# Altium PCB RoomModule.PcbDoc
Units mil, origin at the board's own origin, x right, y up, seen from the top; angles counter-clockwise.
Board outline 4495 x 3260 mil, 2 copper layers (Top Layer, Bottom Layer); 57 components, 52 nets, 206 pads, 0 vias.
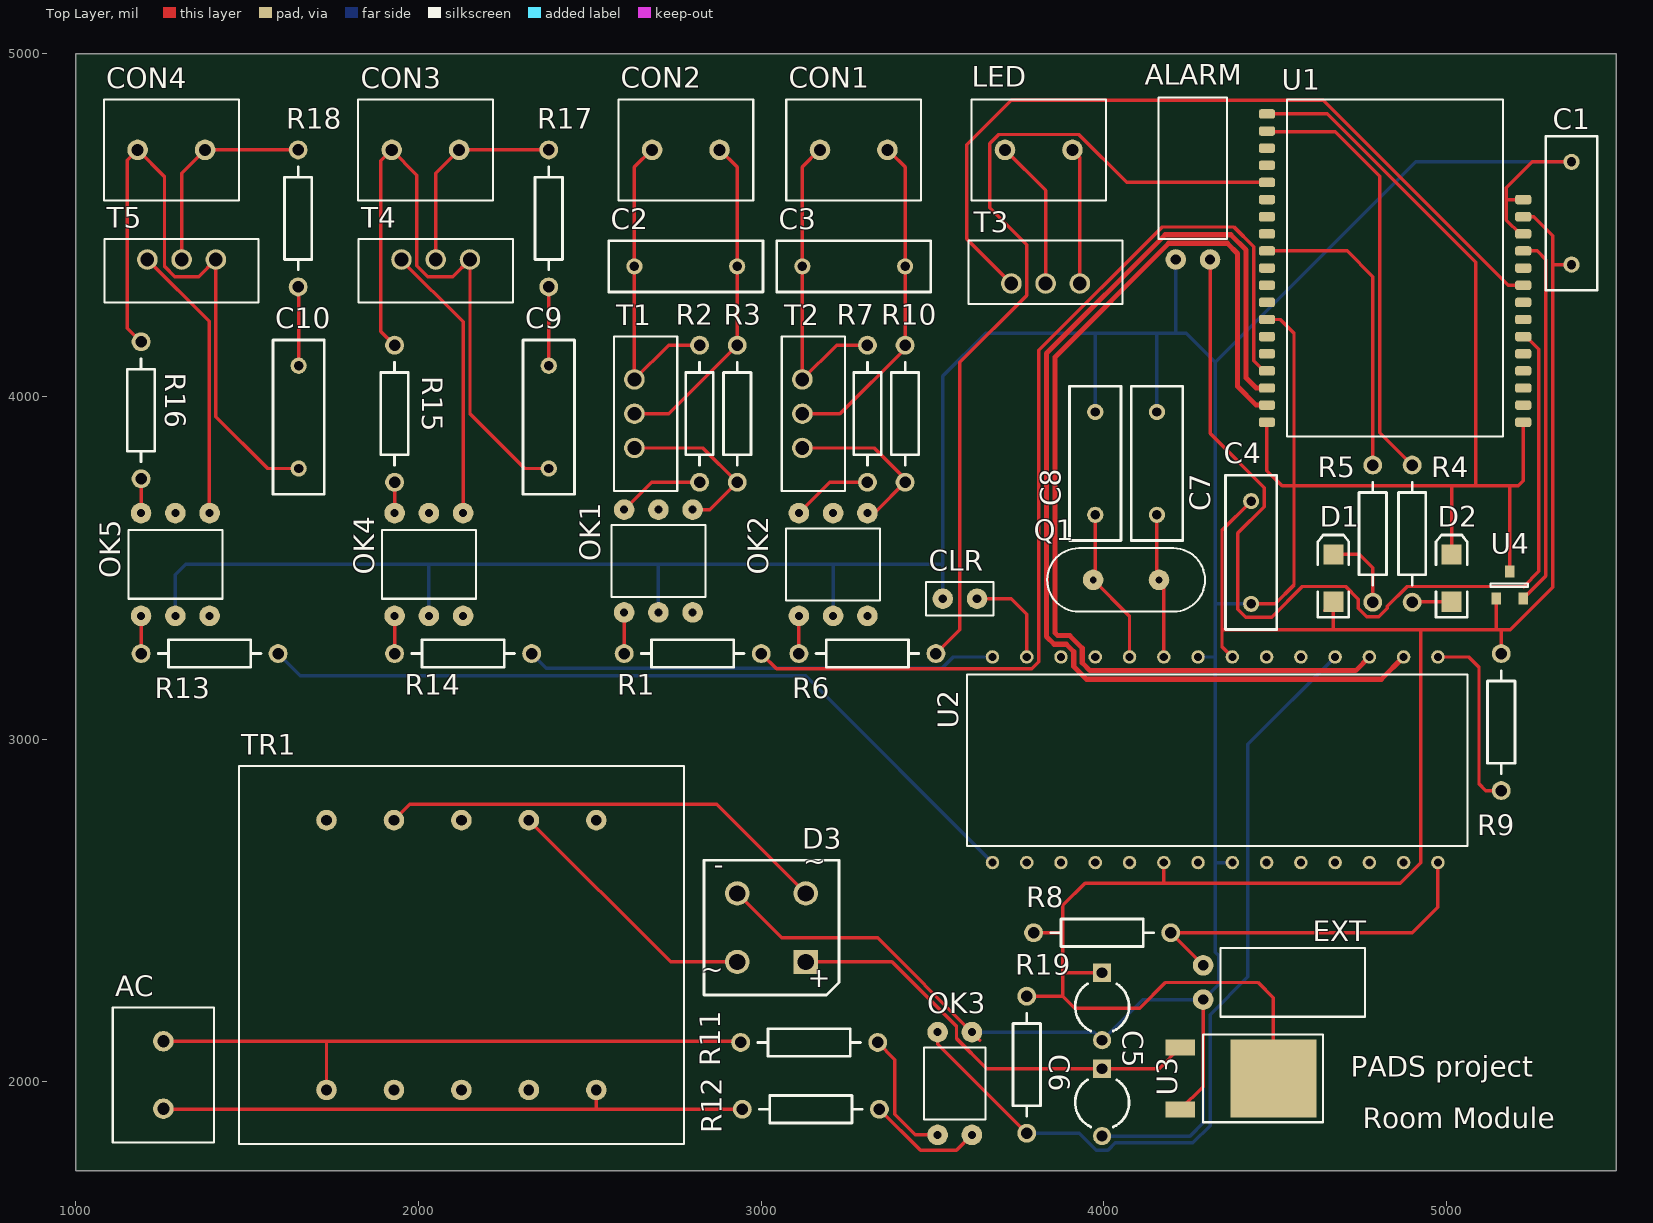
[diagram p0: Top Layer view]
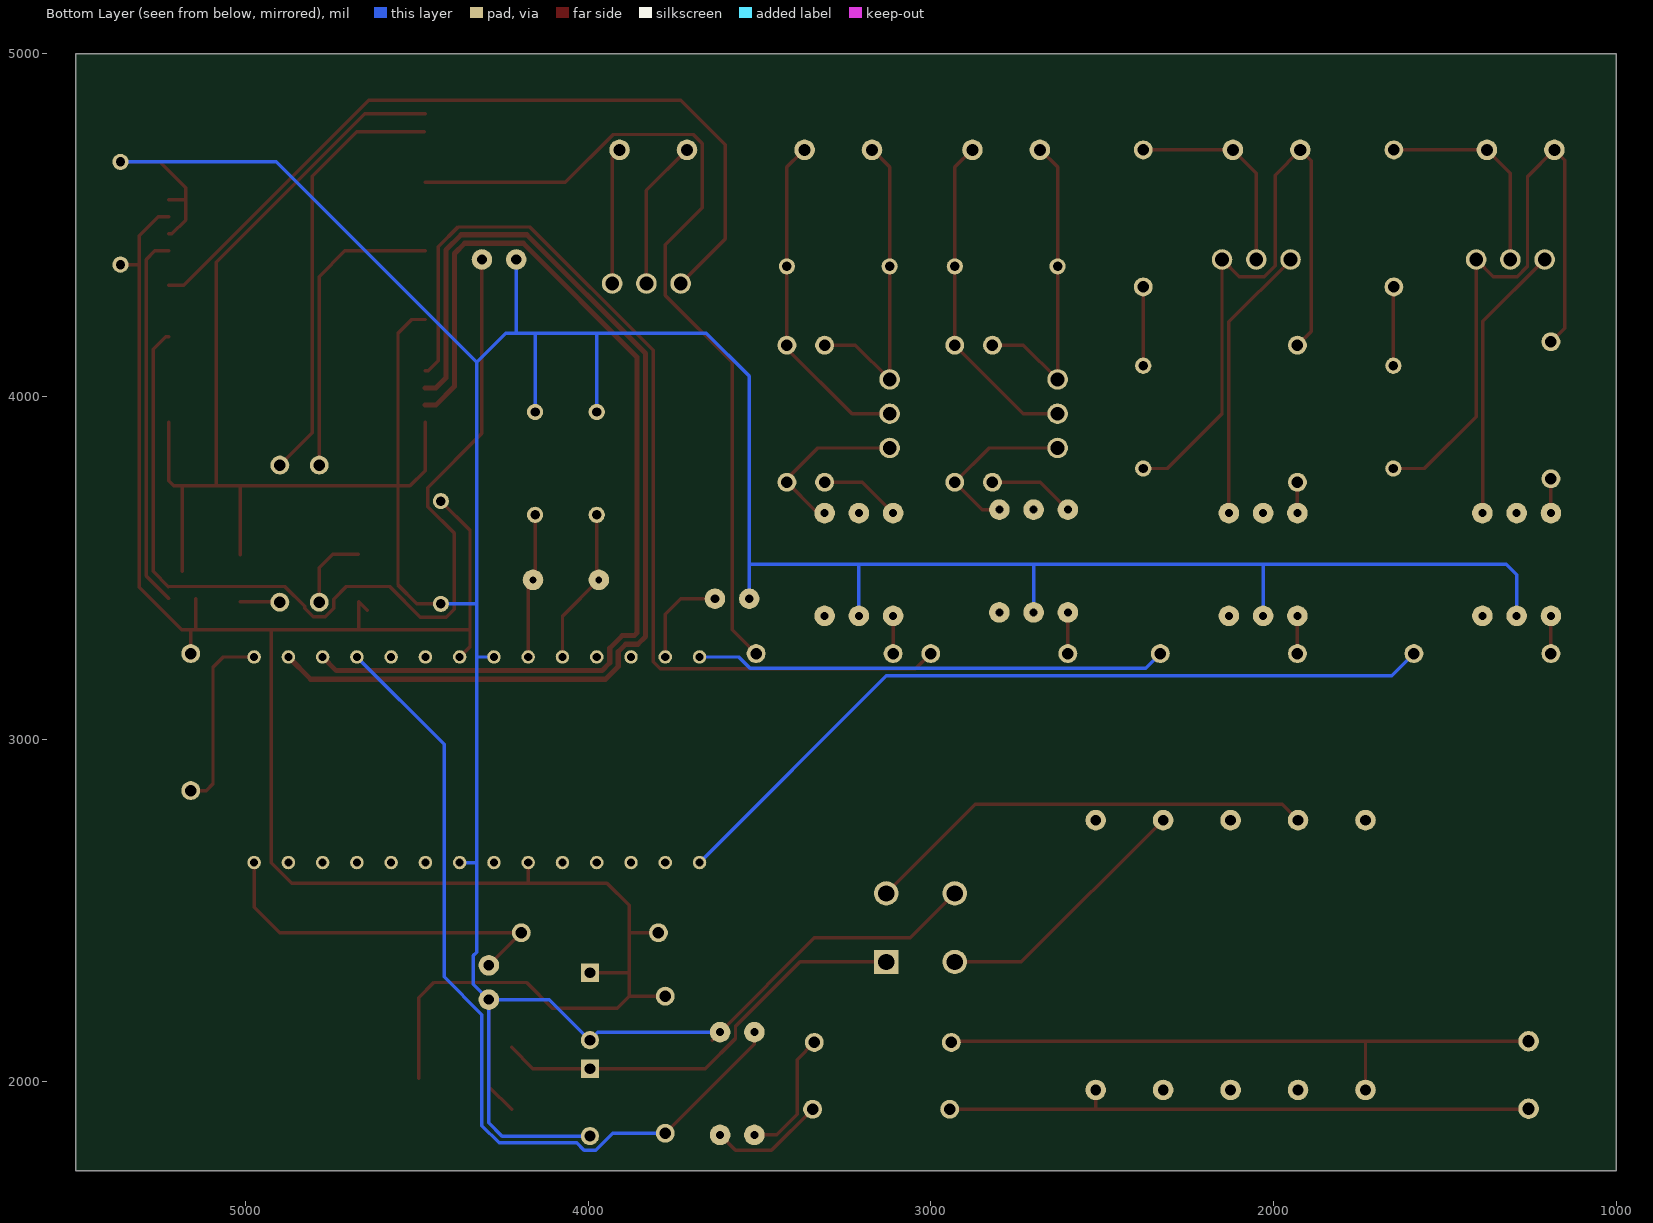
[diagram p1: Bottom Layer view, seen from below]

## Layer stack, top to bottom
Top Solder: solder mask 0.4, Solder Resist, Dk 3.5
Top Layer: signal copper 1.4
Dielectric 1: dielectric 12.6, FR-4, Dk 4.8
Bottom Layer: signal copper 1.4
Bottom Solder: solder mask 0.4, Solder Resist, Dk 3.5

## Board outline
1000,1740 5495,1740 5495,5000 1000,5000

## Design rules (kind name [scope] priority, off if disabled: settings)
Clearance [All] p1: gap=10
DiffPairsRouting [All] p1: maxlimit=10 minlimit=10 mostfreqgap=10 toplayer_minwidth=15 toplayer_maxwidth=15 toplayer_prefwidth=15 bottomlayer_minwidth=15 bottomlayer_maxwidth=15 bottomlayer_prefwidth=15 maxuncoupledlength=500
PolygonConnect [All] p1: connectstyle=Relief reliefconductorwidth=10 reliefentries=4 polygonreliefangle="90 Angle" airgapwidth=10
RoutingVias [All] p1: holewidth=28 width=50 viastyle="Through Hole" minholewidth=28 minwidth=50 maxholewidth=28 maxwidth=50
SolderMaskExpansion [All] p1: expansion=4
Width [All] p1: maxlimit=10 minlimit=10 preferedwidth=10
29 further rules are at their usual default settings.

## Classes and differential pairs
differential pair XD: +XD_P -XD_N

## Components (designator, comment, footprint, x,y, rotation, side; value= is the part's Value field where it differs from the comment)
AC "AK500/2" AK500/2 1255,2020 r90 top
ALARM "NS25-W2K" NS25-W2K 4260,4400 r0 top
C1 "Cap" RAD-0.3 5365,4535 r270 top
C2 "Cap" RAD-0.3 2780,4380 r180 top
C3 "Cap" RAD-0.3 3270,4380 r180 top
C4 "Cap" RAD-0.3 4430,3545 r90 top
C5 "Cap2" CAPR5-4X5 3995,2220 r270 top
C6 "Cap2" CAPR5-4X5 3995,1940 r270 top
C7 "Cap" RAD-0.3 4155,3805 r270 top
C8 "Cap" RAD-0.3 3975,3805 r270 top
C9 "Cap" RAD-0.3 2380,3940 r270 top
C10 "Cap" RAD-0.3 1650,3940 r270 top
CLR "DS1027-01-2AB801" DS1027-01 3580,3410 r180 top
CON1 "AK500/2" AK500/2 3270,4720 r0 top
CON2 "AK500/2" AK500/2 2780,4720 r0 top
CON3 "AK500/2" AK500/2 2020,4720 r0 top
CON4 "AK500/2" AK500/2 1278.43,4720 r0 top
D1 "LED2" 3.2X1.6X1.1 4670,3470 r90 top
D2 "LED2" 3.2X1.6X1.1 5015,3470 r90 top
D3 "Bridge1A" D-38 3030,2450 r180 top
EXT "NS25-W2K" NS25-W2K 4290,2290 r270 top
LED "AK500/2" AK500/2 3810,4720 r180 top
OK1 "MOC3023" DIP6 2700,3520 r90 top
OK2 "MOC3023" DIP6 3210,3510 r90 top
OK3 "PC814" DIP4 3565,1995 r90 top
OK4 "MOC3023" DIP6 2030,3510 r90 top
OK5 "MOC3023" DIP6 1290,3510 r90 top
Q1 "8.00M-HC49SR" HC49-S 4065,3465 r0 top
R1 "Res2" AXIAL-0.4 2800,3250 r180 top
R2 "Res2" AXIAL-0.4 2820,3950 r90 top
R3 "Res2" AXIAL-0.4 2930,3950 r90 top
R4 "Res2" AXIAL-0.4 4900,3600 r90 top
R5 "Res2" AXIAL-0.4 4785,3600 r90 top
R6 "Res2" AXIAL-0.4 3310,3250 r180 top
R7 "Res2" AXIAL-0.4 3310,3950 r90 top
R8 "Res2" AXIAL-0.4 3995,2435 r180 top
R9 "Res2" AXIAL-0.4 5160,3050 r270 top
R10 "Res2" AXIAL-0.4 3420,3950 r90 top
R11 "Res2" AXIAL-0.4 3140,2115 r180 top
R12 "Res2" AXIAL-0.4 3145,1920 r180 top
R13 "Res2" AXIAL-0.4 1390,3250 r180 top
R14 "Res2" AXIAL-0.4 2130,3250 r180 top
R15 "Res2" AXIAL-0.4 1930,3950 r90 top
R16 "Res2" AXIAL-0.4 1190,3960 r90 top
R17 "Res2" AXIAL-0.4 2380,4520 r90 top
R18 "Res2" AXIAL-0.4 1648.43,4520 r90 top
R19 "Res2" AXIAL-0.4 3775,2050 r270 top
T1 "BT138" TO220AB 2630,3950 r270 top
T2 "BT138" TO220AB 3120,3950 r270 top
T3 "BUZ11" TO220AB 3830,4330 r0 top
T4 "BT138" TO220AB 2050,4400 r180 top
T5 "BT138" TO220AB 1308.43,4400 r180 top
TR1 "TEZ1.5/D230/6V" TEZ1.5 2125,2370 r180 top
U1 "ETRX357" ETRX3 4850,4375 r0 top
U2 "ATMEGA8L-8PU" DIP28_600 4325,2940 r270 top
U3 "LM1117T-3.3" TO252 4495,2010 r270 top
U4 "TCN1047AVNBTR" SOT23B 5185,3450 r0 top

## Footprints (in the part's own frame and the unit in brackets; to place one, negate y for a bottom-side part, rotate by r counter-clockwise, add the part's x,y. Pads: shape width x height; smd on the part's side, far side on the other; paste and mask are expansions set on the pad)
3.2X1.6X1.1 [mm] "SMT LED; 2 Flat Leads"
  rect 1.5x1.5 smd: 1(-1.75,0) 2(1.75,0)
  silkscreen extent -2.9,-1.15 3.2,1.15
AK500/2 [mil] "AK500/2 connector"
  round 60 hole 35.43: 1(-98.43,0) 2(98.43,0)
  silkscreen extent -197,-148 197,148, body extent -197,-148 197,148, height 394
AXIAL-0.4 [mm] "Axial Device, Thru-Hole; 2 Leads; 0.4 in Pin Spacing"
  round 1.4 hole 0.85: 1(-5.08,0) 2(5.08,0)
  silkscreen extent -3.81,-1.02 3.81,1.02
CAPR5-4X5 [mm] "Capacitor; 2 Leads"
  rect 1.35x1.35 hole 0.8: 1(-2.5,0)
  round 1.35 hole 0.8: 2(2.5,0)
  silkscreen extent -1.69,-2 1.82,2
D-38 [mm] "Bridge Rectifier; 4 Terminals; Body 9.4 x 9.4 mm (typ); Pitch 5.08 mm"
  rect 1.8x1.8 hole 1.2: 1(-2.54,2.54)
  round 1.8 hole 1.2: 2(-2.54,-2.54) 3(2.54,-2.54) 4(2.54,2.54)
  silkscreen extent -5,-5 5,5, body extent -5,-5 5,5, height 9.91
DIP4 [mil] "Casing DIP4"
  round 60 hole 23.62: 1(-150,50) 2(-150,-50) 3(150,-50) 4(150,50)
  silkscreen extent -105,-90 105,90, body extent -155,-90 155,90, height 169
DIP6 [mil] "Casing DIP6"
  round 60 hole 23.62: 1(-150,100) 2(-150,0) 3(-150,-100) 4(150,-100) 5(150,0) 6(150,100)
  silkscreen extent -105,-137 105,137, body extent -155,-139 155,142, height 209
DIP28_600 [mm] "DIP28 for ATmega8L-8PU"
  round 1 hole 0.6: 1(-7.62,16.51) 2(-7.62,13.97) 3(-7.62,11.43) 4(-7.62,8.89) 5(-7.62,6.35) 6(-7.62,3.81) 7(-7.62,1.27) 8(-7.62,-1.27) 9(-7.62,-3.81) 10(-7.62,-6.35) 11(-7.62,-8.89) 12(-7.62,-11.43) 13(-7.62,-13.97) 14(-7.62,-16.51) 15(7.62,-16.51) 16(7.62,-13.97) 17(7.62,-11.43) 18(7.62,-8.89) 19(7.62,-6.35) 20(7.62,-3.81) 21(7.62,-1.27) 22(7.62,1.27) 23(7.62,3.81) 24(7.62,6.35) 25(7.62,8.89) 26(7.62,11.43) 27(7.62,13.97) 28(7.62,16.51)
  silkscreen extent -6.32,-18.39 6.38,18.71, body extent -7.8,-18.6 7.69,18.7, height 5.7
DS1027-01 [mil] "2.54 mm Jumper"
  round 60 hole 25.2: 1(-50,0) 2(50,0)
  silkscreen extent -98,-49 98,49, body extent -98,-49 98,49, height 295
ETRX3 [mm] "Casing for ETRX3 modules"
  rrect50% 1.2x0.7 smd: 1(-9.5,11.43) 2(-9.5,10.16) 3(-9.5,8.89) 4(-9.5,7.62) 5(-9.5,6.35) 6(-9.5,5.08) 7(-9.5,3.81) 8(-9.5,2.54) 9(-9.5,1.27) 10(-9.5,0) 11(-9.5,-1.27) 12(-9.5,-2.54) 13(-9.5,-3.81) 14(-9.5,-5.08) 15(-9.5,-6.35) 16(-9.5,-7.62) 17(-9.5,-8.89) 18(-9.5,-10.16) 19(-9.5,-11.43) 20(9.5,-11.43) 21(9.5,-10.16) 22(9.5,-8.89) 23(9.5,-7.62) 24(9.5,-6.35) 25(9.5,-5.08) 26(9.5,-3.81) 27(9.5,-2.54) 28(9.5,-1.27) 29(9.5,0) 30(9.5,1.27) 31(9.5,2.54) 32(9.5,3.81) 33(9.5,5.08)
  silkscreen extent -8,-12.5 8,12.5, body extent -9.5,-12.5 9.5,12.5, height 3.8
HC49-S [mil] "Casing HC49-S for quartz crystals"
  round 60 hole 19.68: 1(-96.06,0) 2(96.06,0)
  silkscreen extent -230,-93 230,93, body extent -216,-88 216,88, height 142
NS25-W2K [mil] "2-pin connector"
  round 60 hole 30: 1(-50,0) 2(50,0)
  silkscreen extent -100,60 100,472, body extent -100,0 100,472, height 232
RAD-0.3 [mm] "Radial Cap, Thru-Hole; 2 Leads; 0.3 in Pin Spacing"
  round 1.2 hole 0.7: 1(-3.81,0) 2(3.81,0)
  silkscreen extent -5.71,-1.91 5.71,1.91
SOT23B [mm] "3-pin casing SOT23B"
  rect 0.7x0.9 smd: 1(-1,-1) 2(1,-1) 3(0,1)
  silkscreen extent -1.45,-0.13 1.35,0.13, body extent -1.5,-1.27 1.5,1.27, height 1.1
TEZ1.5 [mm]
  round 1.524 hole 0.8: 1(-10,10) 2(-5,10) 3(0,10) 4(5,10) 5(10,10) 6(10,-10) 7(5,-10) 8(0,-10) 9(-5,-10) 10(-10,-10)
  silkscreen extent -16.5,-14 16.5,14, body extent -16.5,-14 16.5,14, height 22
TO220AB [mil] "Casing TO220AB"
  round 60 hole 40: 1(-100,0) 2(0,0) 3(100,0)
  silkscreen extent -225,-60 225,125, body extent -221,-59 221,126, height 805
TO252 [mm] "TO252 case"
  rect 1.2x2.2 smd: 1(-2.3,-6.9) 3(2.3,-6.9)
  rect 5.8x6.4 smd: 2(0,0)
  silkscreen extent -3.25,-5.21 3.25,3.68, body extent -3.37,-6.6 3.37,3.5, height 2.41

## Part data
AC CON1 CON2 CON3 CON4 LED: "AK500/2 connector"
ALARM EXT: "2-pin Right Angle PCB Connector"
C1 C2 C3 C4 C5 C6 C7 C8 C9 C10: "Capacitor"
CLR: "2.54 mm jumper"
D1 D2: "Typical RED, GREEN, YELLOW, AMBER GaAs LED"
D3: library part Bridge1, "Full Wave Diode Bridge"
OK1 OK2 OK4 OK5: "6-Pin DIP Random-Phase Optoisolators Triac Driver Output"
OK3: "4 pin DIP phototransistor photocoupler"
Q1: "HC49SR 8 MHz crystal"
R1 R2 R3 R4 R5 R6 R7 R8 R9 R10 R11 R12 R13 R14 R15 R16 R17 R18 R19: "Resistor"
T1 T2 T4 T5: "Passivated triac in a plastic envelope, intended for use in applications requiring high bidirectional transient and blocking voltage capability and high thermal cycling performance."
T3: "N-Channel Power MOSFET 50V, 30A, 40mOhm"
TR1: "Transformer for PCB"
U1: "Low power 2.4GHz ZigBee module, based on the latest Ember EM357 single chip ZigBeeTM solution"
U2: "8-bit AVR with 8K Bytes In-System Programmable Flash"
U3: library part LM1117DT-3.3, "LDO voltage regulator with 800mA output current and 3.3V fixed voltage"
U4: library part TC1047AVNBTR, "Precision Temperature-to-Voltage Converter"

## Nets (pads, with @x,y where several pads share a name; then routed paths per layer and width w, separated by ;. In a path a pad name is that pad's centre, name@x,y a point inside that pad or via, vN(x,y) a via of type N, cw(c..) or ccw(c..) an arc to the next point about the centre after c; other vN are vias at no path point)
3.3V: C1.2 C4.2 C5.1 D1.1 R8.2 R9.1 R19.1 U1.32 U2.7 U2.20 U3.2 U4.1 | length 6298.7
  Top Layer w10: R19.1 3880,2250 ; R8.2 3880,2435 ; 3883.43,2318.43 C5.1 ; U2.20 4175,2580 ; 4345,3320 4670,3320 ; U2.7 4345,3270 4345,3610 C4.2 ; U3.2 4495,2245 4450,2290 4180,2290 4105,2215 3915,2215 3880,2250 ; D1.1@4645,3376.1 D1.1 4670,3320 ; U4.1 5145.63,3320 ; R9.1 5160,3320 ; U1.32 5255,4525 5310,4470 5310,3443.55 5186.45,3320 5160,3320 ; 5310,4385 C1.2@5360,4385 ; 3880,2250 3880,2435 ; 3880,2435 3880,2515 3945,2580 4175,2580 ; 4175,2580 4865,2580 4925,2640 4925,3320 ; 4670,3320 4925,3320 ; 4925,3320 5145.63,3320 ; 5145.63,3320 5160,3320
GND: ALARM.1 C1.1 C4.1 C5.2 C6.2 C7.1 C8.1 CLR.2 D2.2 D3.3 EXT.2 OK1.2 OK2.2 OK3.3 OK4.2 OK5.2 U1.1 U1.13 U1.19 U1.20 U1.31 U1.33 U2.8 U2.22 U3.3 U4.3 | length 15413.1
  Top Layer w10: D3.3 3060,2420 3340,2420 OK3.3 3638.43,2121.57 ; U3.3 4290,1986.1 EXT.2 ; C4.1 4500,3395 4555,3450 4555,3740 ; U1.19 4475.98,3784.02 4520,3740 4555,3740 ; U1.13 4515,4225 4555,4185 4555,3740 ; U1.1 4651.72,4825 5085,4391.72 5085,3740 ; D2.2 5015,3740 ; U4.3 5185,3740 ; U1.20 5224.02,3754.02 5210,3740 5185,3740 ; U1.31 5215.26,4475 5175,4515.26 5175,4575 ; U1.33 5175,4575 ; C1.1 5250,4685 5175,4610 5175,4575 ; 4555,3740 5015,3740 ; 5015,3740 5085,3740 ; 5085,3740 5185,3740
  Bottom Layer w10: OK5.2 1290,3480 1320,3510 2030,3510 ; OK4.2 2030,3510 ; OK1.2 2700,3510 ; OK2.2 3210,3510 ; CLR.2 3530,3510 ; OK3.3 3971.57,2145 C5.2 4113.43,2240 EXT.2 ; C8.1 3975,4185 ; C6.2 4251.57,1841.57 4290,1880 EXT.2 ; C7.1 4155,4185 ; ALARM.1 4210,4185 ; U2.8 4325,3240 ; U2.22 4325,2640 ; C4.1 4325,3395 ; C1.1 4910,4685 4325,4100 ; 2030,3510 2700,3510 ; 2700,3510 3210,3510 ; 3210,3510 3530,3510 ; 3530,3510 3530,4060 3655,4185 3975,4185 ; 3975,4185 4155,4185 ; 4155,4185 4210,4185 ; 4210,4185 4240,4185 4325,4100 ; EXT.2 4335,2285 4335,2368.64 4325,2378.64 4325,2640 ; 4325,2640 4325,3240 ; 4325,3240 4325,3395 ; 4325,3395 4325,4100
NetAC_1: AC.1 R12.2 TR1.1 | length 1743.4
  Top Layer w10: AC.1@1256.57,1920 R12.2 ; 2518.7,1921.3 TR1.1
NetAC_2: AC.2 R11.2 TR1.5 | length 1822.4
  Top Layer w10: AC.2 R11.2@2936.57,2118.43 ; TR1.5 1731.3,2117.13
NetALARM_2: ALARM.2 U1.25 | length 2863.5
  Top Layer w10: ALARM.2 4310,3892.24 4468.62,3733.62 4468.62,3679 4391.38,3601.76 4391.38,3379 4414,3356.38 4489.66,3356.38 4578.91,3445.63 4705.74,3445.63 4742.44,3408.93 4742.44,3382.37 4767.37,3357.44 4802.63,3357.44 4827.56,3382.37 4827.56,3387.75 4885.44,3445.63 5224.37,3445.63 5225,3445 5270,3490 5270,4137.77 5232.77,4175 U1.25
NetC2_1: C2.1 CON2.2 R3.2 T1.2 | length 974.7
  Top Layer w10: T1.2 2730,3950 R3.2 2930,4670 CON2.2@2879.21,4720.79
NetC2_2: C2.2 CON2.1 R2.2 T1.1 | length 923.2
  Top Layer w10: CON2.1@2680.79,4720.79 2630,4670 T1.1 2730,4150 R2.2
NetC3_1: C3.1 CON1.2 R10.2 T2.2 | length 975.9
  Top Layer w10: T2.2 3230,3950 3420,4140 3420,4670 3378.43,4711.57 CON1.2@3378.43,4720
NetC3_2: C3.2 CON1.1 R7.2 T2.1 | length 933.7
  Top Layer w10: CON1.1@3181.57,4720 3170,4720 3120,4670 T2.1 3220,4150 R7.2
NetC6_1: C6.1 D3.1 U3.1 | length 1268.8
  Top Layer w10: D3.1 3381.72,2350 3570,2161.72 3570,2126.36 3657.94,2038.43 C6.1 4161.22,2038.43 U3.1
NetC7_2: C7.2 Q1.2 U2.9 | length 395
  Top Layer w10: Q1.2@4155,3471.06 C7.2 ; U2.9 Q1.2@4175,3451.06
NetC8_2: C8.2 Q1.1 U2.10 | length 452.9
  Top Layer w10: Q1.1 4075,3358.94 U2.10 ; Q1.1@3975,3471.06 C8.2
NetC9_1: C9.1 R17.1 | length 230
  Top Layer w10: C9.1 R17.1
NetC9_2: C9.2 CON3.1 R15.2 T4.1 | length 1903.7
  Top Layer w10: R15.2 1890,4190 1890,4688.43 CON3.1 1995,4646.57 1995,4381.36 2026.36,4350 2100,4350 T4.1 2150,3950 2310,3790 C9.2
NetC10_1: C10.1 R18.1 | length 228.4
  Top Layer w10: C10.1 R18.1@1650,4318.43
NetC10_2: C10.2 CON4.1 R16.2 T5.1 | length 1907.4
  Top Layer w10: R16.2 1150,4200 1150,4690 CON4.1 1258.43,4641.57 1258.43,4380 1288.43,4350 1358.43,4350 T5.1 1408.43,3941.57 1560,3790 C10.2
NetCLR_1: CLR.1 U2.13 | length 288.6
  Top Layer w10: CLR.1 3730,3410 3775,3365 U2.13
NetCON3_2: CON3.2 R17.2 T4.2 | length 609.9
  Top Layer w10: T4.2 2050,4651.57 CON3.2 R17.2
NetCON4_2: CON4.2 R18.2 T5.2 | length 619.9
  Top Layer w10: T5.2 1308.43,4651.57 CON4.2 R18.2
NetD1_2: D1.2 R5.1 | length 230.5
  Top Layer w10: D1.2@4671.1,3540 4745,3540 4785,3500 R5.1
NetD2_1: D2.1 R4.1 | length 113.9
  Top Layer w10: R4.1@4901.1,3401.1 D2.1
NetD3_2: D3.2 TR1.7 | length 1328.7
  Top Layer w10: TR1.7 1974.45,2810 2870,2810 D3.2
NetD3_4: D3.4 TR1.9 | length 779.5
  Top Layer w10: TR1.9 2735.55,2350 D3.4
NetEXT_1: EXT.1 R8.1 U2.28 | length 1075.4
  Top Layer w10: EXT.1 R8.1 4900,2435 4975,2510 U2.28
NetLED_1: LED.1 T3.3 | length 398.9
  Top Layer w10: LED.1 3930,4698.43 T3.3
NetLED_2: LED.2 T3.2 | length 439.1
  Top Layer w10: LED.2 3830,4601.57 T3.2
NetOK1_1: OK1.1 R1.2 | length 120
  Top Layer w10: R1.2 OK1.1
NetOK1_4: OK1.4 R3.1 T1.3 | length 504.6
  Top Layer w10: T1.3 2830,3850 R3.1 2850,3670 OK1.4
NetOK1_6: OK1.6 R2.1 | length 253.1
  Top Layer w10: OK1.6 2680,3750 R2.1
NetOK2_1: OK2.1 R6.2 | length 110
  Top Layer w10: R6.2 OK2.1
NetOK2_4: OK2.4 R10.1 T2.3 | length 498.7
  Top Layer w10: T2.3 3330,3850 3425,3755 3330,3660 OK2.4
NetOK2_6: OK2.6 R7.1 | length 237.3
  Top Layer w10: OK2.6 3200,3750 R7.1
NetOK3_1: OK3.1 R11.1 | length 380.6
  Top Layer w10: R11.1 3390,2065 3390,1905 3450,1845 OK3.1
NetOK3_2: OK3.2 R12.1 | length 338.3
  Top Layer w10: R12.1 3465,1800 3570,1800 OK3.2
NetOK3_4: OK3.4 R19.2 U2.4 | length 2507.6
  Top Layer w10: OK3.4 3515,2110 R19.2
  Bottom Layer w10: R19.2 3927.78,1850 3977.78,1800 4012.22,1800 4033.8,1821.57 4259.86,1821.57 4310,1871.72 4310,2196.36 4420,2306.36 4420,2985 U2.4
NetOK4_1: OK4.1 R14.2 | length 110
  Top Layer w10: R14.2 OK4.1
NetOK4_4: OK4.4 T4.3 | length 820.9
  Top Layer w10: T4.3@1950,4398.08 2130,4218.08 2130,3680 OK4.4@2150,3660
NetOK4_6: OK4.6 R15.1 | length 90
  Top Layer w10: OK4.6 R15.1
NetOK5_1: OK5.1 R13.2 | length 110
  Top Layer w10: R13.2 OK5.1
NetOK5_4: OK5.4 T5.3 | length 814.6
  Top Layer w10: T5.3 1388.43,4220 OK5.4@1388.43,3660
NetOK5_6: OK5.6 R16.1 | length 100
  Top Layer w10: OK5.6 R16.1
NetR1_1: R1.1 U1.16 | length 2930.1
  Top Layer w10: R1.1 3044.69,3205.31 3789.37,3205.31 3809.69,3225.63 3809.69,4134.69 4170,4495 4380,4495 4437.36,4437.64 4437.36,4104.87 4467.23,4075 U1.16
NetR4_2: R4.2 U1.2 | length 1264
  Top Layer w10: U1.2@4477.63,4773.36 4675.07,4773.36 4805,4643.43 4805,3895 R4.2
NetR5_2: R5.2 U1.9 | length 890.1
  Top Layer w10: U1.9 4710,4425 4785,4350 R5.2
NetR6_1: R6.1 U1.5 | length 2521.6
  Top Layer w10: R6.1 3580,3320 3580,4100 3775,4295 3775,4443.15 3666.57,4551.57 3666.57,4738.64 3692.94,4765 3927.06,4765 4067.06,4625 U1.5
NetR9_2: R9.2 U2.1 | length 545.7
  Top Layer w10: U2.1 5065,3240 5095,3210 5095,2870 5115,2850 R9.2
NetR13_1: R13.1 U2.15 | length 2337.7
  Bottom Layer w10: R13.1 1655,3185 3130,3185 U2.15
NetR14_1: R14.1 U2.14 | length 1376.1
  Bottom Layer w10: R14.1 2372.56,3207.44 3527.63,3207.44 3560.19,3240 U2.14
NetT3_1: T3.1 U1.28 | length 2360.4
  Top Layer w10: T3.1 3600,4460 3600,4735 3730,4865 4640,4865 5180,4325 U1.28
NetU1_30: U1.30 U4.2 | length 1092.9
  Top Layer w10: U1.30 5265,4425 5290,4400 5290,3476.26 U4.2
XD_N: U1.18 U2.3 | length 2989.4
  Top Layer w15: U1.18 4444.86,3975 4389.86,4030 4389.86,4417.96 4360.32,4447.5 4189.68,4447.5 3857.19,4115.01 3857.19,3310.4 3865.4,3302.18 3900.76,3302.18 3937.19,3265.76 3937.19,3222.81 3960,3200 4735,3200 U2.3
XD_P: U1.17 U2.2 | length 3163.6
  Top Layer w15: U1.17 4444.86,4025 4414.86,4055 4414.86,4428.32 4370.68,4472.5 4179.32,4472.5 3832.19,4125.37 3832.19,3300.05 3855.05,3277.18 3890.4,3277.18 3912.19,3255.4 3912.19,3212.46 3949.64,3175 4810,3175 U2.2
pads on no net: OK1.3 OK1.5 OK2.3 OK2.5 OK4.3 OK4.5 OK5.3 OK5.5 TR1.2 TR1.3 TR1.4 TR1.6 TR1.8 TR1.10 U1.3 U1.4 U1.6 U1.7 U1.8 U1.10 U1.11 U1.12 U1.14 U1.15 U1.21 U1.22 U1.23 U1.24 U1.26 U1.27 U1.29 U2.5 U2.6 U2.11 U2.12 U2.16 U2.17 U2.18 U2.19 U2.21 U2.23 U2.24 U2.25 U2.26 U2.27

## Silkscreen, mask and mechanical layers (free items; w line width, h text height)
Top Overlay:
  text "PADS project" at 4720,2015 h60
  text "Room Module" at 4755,1865 h60

## Text inside footprints (layer, text, board x,y; h text height)
D3: Top Overlay "+" at 3203.62,2325.43 h59.06 r180; Top Overlay "-" at 2890,2650 h59.05 r180; Top Overlay "~" at 3190,2665 h59.05 r180; Top Overlay "~" at 2890,2350 h59.05 r180